# EAGLE board proximity (EAGLE 5.10)
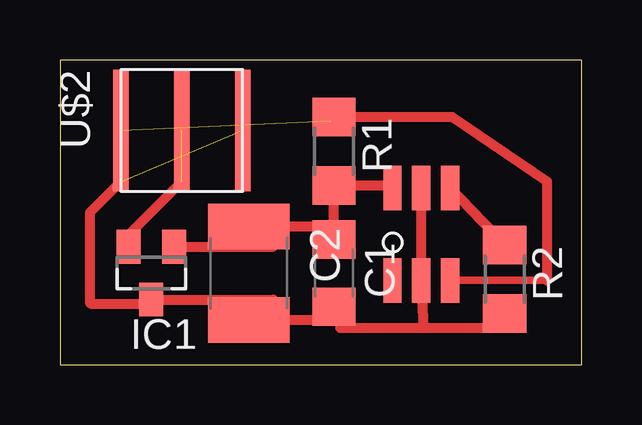
[diagram p0: board, top side]

Size 21.77 x 12.69 mm. Coordinates in mm from the lower left corner, seen from the top.
Outline: 0,0 21.77,0 21.77,12.69 0,12.69 0,0
Copper layers (1*16): Top 0.035mm / dielectric 1.5mm / Bottom 0.035mm
Design rules "default *": minimum track width 10mil, minimum drill 24mil, track to track 16mil, track to pad 16mil, pad to pad 16mil, via to via 16mil, smd to smd 16mil, copper to edge 40mil, drill to drill 8mil, minimum pad ring 10mil, minimum via ring 8mil, stop-mask expansion 4mil, vias tented up to drill 0mil, thermal gap 10mil

## Footprints (pad centres in the part's own frame; a part is rotated, then mirrored left to right if it is on the bottom)
C1206 = smd 1.6 x 1.8: 1 -1.4,0; 2 1.4,0
C4532 = smd 1.9 x 3.4: 1 -1.95,0; 2 1.95,0
SOT23 = smd 1 x 1.4: 1 -0.95,-1.1; 2 0.95,-1.1; 3 0,1.1
1206 = smd 1.6 x 1.803: 1 -1.422,0; 2 1.422,0
SFH7741-SMD = smd 1.85 x 0.762: P$1 -0.3,0; P$2 -0.3,-1.2; P$3 -0.3,-2.4; P$4 3.55,-1.2; P$5 3.55,0; P$6 3.55,-2.4
SMT_PINS_3 = smd 5.08 x 0.635: 1 0,0; 2 0,2.54; 3 0,5.08

## Placement (x,y rotation side)
C1  [C1206]  11.43,3.81 270 top
C2  [C4532]  7.87,3.81 270 top
IC1  [SOT23]  3.81,3.81 180 top
R1  [1206]  11.43,8.89 270 top
R2  [1206]  18.54,3.56 270 top
U$1  SFH7741  [SFH7741-SMD]  13.87,3.81 90 top
U$2  [SMT_PINS_3]  2.54,9.75 270 top

## Library data of the parts
C1 C2 = rcl
IC1 R1 R2 U$2 = ng
U$1 = rfc

## Nets
N$1: C1.1 C2.1 IC1.1 R1.2 U$1.P$5
N$2: IC1.2 U$2.2
N$3: R1.1 U$1.P$3 U$2.1
N$4: R2.1 U$1.P$6
PE: C1.2 C2.2 IC1.3 R2.2 U$1.P$2 U$1.P$4 U$2.3

## Tracks (layer width: path | path; a pad name or v marks a point on that pad's centre or on a via)
N$1
  Top 0.406: IC1.1 8.89,4.91 C2.1 11.43,5.76 C1.1 R1.2 13.97,7.47 U$1.P$5
N$2  (1 unrouted)
  Top 0.406: IC1.2 2.86,5.4 5.08,7.62
N$3  (1 unrouted)
  Top 0.305: U$1.P$3 20.32,3.51
  Top 0.406: 11.28,10.16 R1.1 16.36,10.31 20.32,7.62 20.32,3.51
N$4
  Top 0.406: R2.1 U$1.P$6
PE  (1 unrouted)
  Top 0.406: 15.17,1.52 11.68,1.52 11.68,2.41 C1.2 11.43,1.86 C2.2 8.89,2.71 IC1.3 3.81,2.54 1.27,2.54 1.27,6.35 2.54,7.62 | 15.17,1.52 U$1.P$2 U$1.P$4 | 15.17,1.52 18.8,1.52 R2.2